# Altium PCB STM32控制器.PCBDOC (part 1 of 2)
Units mil, origin at the board's own origin, x right, y up, seen from the top; angles counter-clockwise.
Board outline 2755.91 x 393.7 mil, 4 copper layers (Top Layer, 2, 3, Bottom Layer), stack 30.634 mil thick; 86 components, 64 nets, 285 pads, 84 vias.
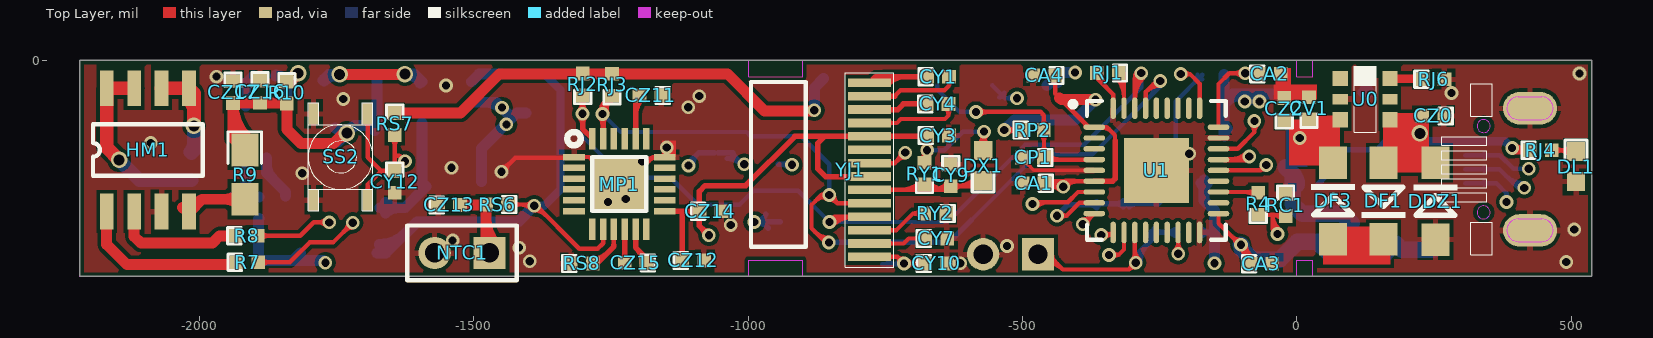
[diagram p0: Top Layer view]
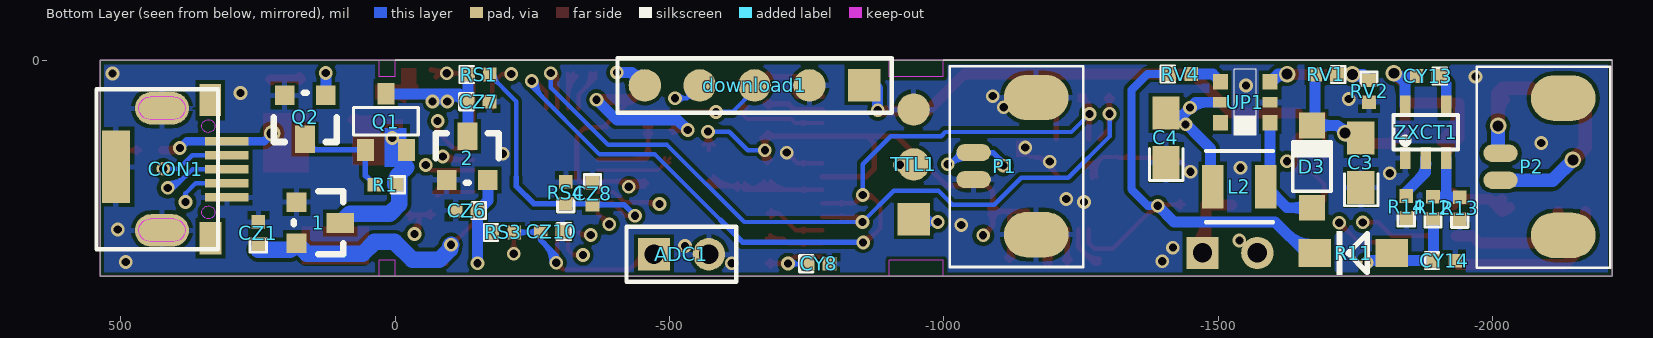
[diagram p1: Bottom Layer view, seen from below]
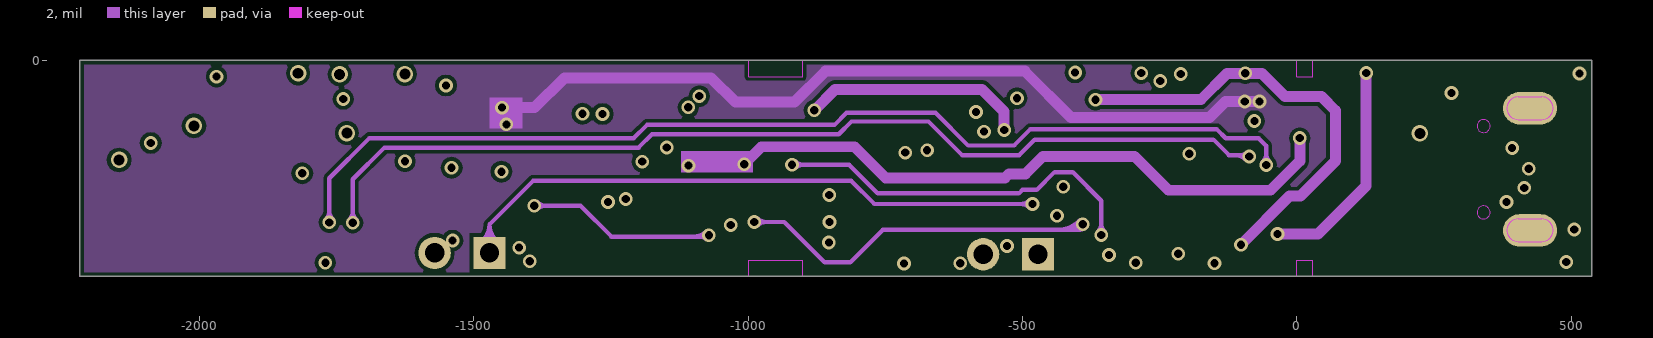
[diagram p2: 2]
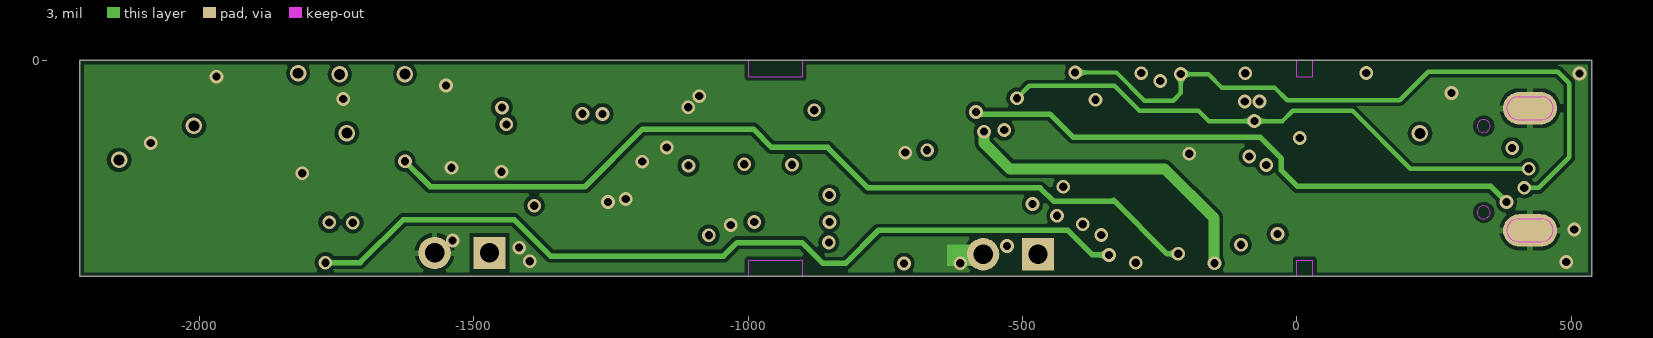
[diagram p3: 3]

## Layer stack, top to bottom
Top Layer: signal copper 1.4
Dielectric: core 10, FR-4, Dk 4.2
2: signal copper 1.417
Dielectric: prepreg 5, Dk 4.2
3: signal copper 1.417
Dielectric: core 10, Dk 4.2
Bottom Layer: signal copper 1.4

## Board outline
-2218.11,-393.7 537.8,-393.7 537.8,0 -2218.11,0

## Design rules (kind name [scope] priority, off if disabled: settings)
Clearance [All] p1: gap=7
ComponentClearance [All] p1: gap=10 collisioncheckmode=3
PolygonConnect [All] p1: connectstyle=Relief reliefconductorwidth=10 reliefentries=4 polygonreliefangle="90 Angle"
RoutingVias [All] p1: holewidth=28 width=50 viastyle="Through Hole" minholewidth=1 minwidth=1 maxholewidth=111 maxwidth=111
SolderMaskExpansion [All] p1: expansion=4
TestPointUsage FabricationTestPointUsage [All] p1: valid=0 allowmultiple=FALSE
Testpoint FabricationTestpoint [(IsPad And (OnTopLayer Or OnBottomLayer))] p1: side=3 testpointundercomponent=TRUE minsize=40 maxsize=100 preferedsize=60 minholesize=0 maxholesize=40 preferedholesize=32 testpointgrid=1 style=297 order=1234567890
Width [All] p1: maxlimit=1111 minlimit=1 preferedwidth=10 toplayer_prefwidth=8 midlayer1_prefwidth=20 bottomlayer_prefwidth=30 minimp=50.000000 maximp=50.000000 favimp=50.000000
17 further rules are at their usual default settings.

## Components (designator, comment, footprint, x,y, rotation, side; value= is the part's Value field where it differs from the comment)
1 "662K" SOT23-3-1 179.86,-258.38 r270 bottom
2 "662K" SOT23-3-1 -93.77,-217.94 r180 bottom
ADC1 "Header 2" HDR1X2 -471.71,-353.23 r180 bottom
C3 "22uF" 0805 -1760.33,-231.61 r90 bottom
C4 "22uF" 0805 -1404.98,-185.63 r90 bottom
CA1 "104" 0402 -459.7,-223.9 r180 top
CA2 "104" 0402 -69.21,-24.4 r0 top
CA3 "104" 0402 -84.49,-370.65 r0 top
CA4 "104" 0402 -440.48,-27.24 r180 top
CON1 "USB_1" "USB 贴片 - 2" 307.06,-147.08 r180 bottom
CP1 "104" 0402 -460.87,-176.72 r180 top
CV1 "10uF" 0402 22.42,-107.23 r90 top
CY1 "105" 0402 -673.91,-29.53 r0 top
CY3 "4.7uf" 0402 -673.83,-136.77 r0 top
CY4 "105" 0402 -674.83,-79.3 r0 top
CY7 "2.2UF" 0402 -677.33,-324.41 r0 top
CY8 "4.7UF" 0402 -751.78,-370.53 r180 bottom
CY9 "4.7UF" 0402 -630.6,-189.44 r270 top
CY10 "0.1UF" 0402 -677.45,-369.92 r0 top
CY12 "104" 0402 -1644.29,-201.31 r270 top
CY13 "104" 0402 -1901.86,-28.29 r0 bottom
CY14 "4.7uF" 0402 -1892.39,-364.81 r180 bottom
CZ0 "105" 0402 268.75,-101.04 r180 top
CZ1 "105" 0402 249.49,-334.5 r90 bottom
CZ2 "105" 0402 -23.03,-108.34 r90 top
CZ6 "105" 0402 -150.17,-273.72 r0 bottom
CZ7 "105" 0402 -132.03,-75.34 r180 bottom
CZ8 "104" 0402 -359.77,-222.72 r270 bottom
CZ10 "104" 0402 -305.12,-311.97 r0 bottom
CZ11 "104" 0402 -1157.98,-63.74 r180 top
CZ12 "104" 0402 -1120.14,-364.47 r0 top
CZ13 "104" 0402 -1565.37,-263.23 r0 top
CZ14 "104" 0402 -1088.86,-274.77 r0 top
CZ15 "104" 0402 -1185.24,-368.96 r180 top
CZ16 "106" 0402 -1889.83,-37.06 r270 top
CZ17 "104" 0402 -1939.08,-37.61 r270 top
D3 "MBR0520" SOD-123 -1671.11,-193.43 r270 bottom
DDZ1 "25V" DIODE_SOP 252.67,-326.73 r90 top
DF1 "M7" DIODE_SOP 157.86,-186.06 r270 top
DF3 "M7" DIODE_SOP 66.09,-326.07 r90 top
DL1 "RED" 0603 508.73,-193.77 r270 top
download1 "Header 5" HDR1X5 -855.09,-45.38 r0 bottom
DX1 "SS14" 0603 -571.57,-190.96 r90 top
HM1 "HM2503" SOP-8 -2169.32,-275.26 r90 top
L2 "4.7uH" L3*3mm -1486.95,-230.09 r0 bottom
MP1 "MPU6050" QFN24 -1234.89,-225.22 r0 top
NTC1 "2.54-2P" HDR1X2 -1471.61,-350.84 r180 top
P1 "1.25-2P" 1.25卧贴-立式通用-2P -1054.26,-167.92 r270 bottom locked
P2 "1.25-2P" 1.25卧贴-立式通用-2P -2014.83,-169 r270 bottom
Q1 "P-MOS AO3401" SOT23 16.91,-111.92 r180 bottom
Q2 "NPN 8050/9013" NPN-SOT3 126.47,-63.54 r0 bottom
R1 "100K" 0402 -2.23,-226.5 r0 bottom
R4 "1K" 0402 -70.33,-281.01 r90 top
R7 "1K" 0402 -1933.14,-367.9 r0 top
R8 "1K" 0402 -1933.99,-319.55 r0 top
R9 "0.50R" 0805 -1917.23,-162.95 r270 top
R10 "500R" 0402 -1840.91,-38.57 r270 top
R11 "1N4148" DIODE_SOP -1816.46,-351.04 r0 bottom
R12 "2K" 0402 -1891.56,-288.42 r90 bottom
R13 "5.1K" 0402 -1940.43,-289.47 r90 bottom
R14 "0" 0402 -1843.02,-286.99 r90 bottom
RC1 "10K" 0402 -20.3,-243.5 r270 top
RJ1 "10K" 0402 -324.72,-22.78 r180 top
RJ2 "10K" 0402 -1301.76,-63.68 r90 top
RJ3 "10K" 0402 -1248.1,-64.25 r90 top
RJ4 "1K" 0402 424.9,-163.64 r0 top
RJ6 "1.66K" 0402 229.44,-34.24 r0 top
RP2 "10K" 0402 -501.07,-126.8 r0 top
RS1 "100K" 0402 -132.58,-25.63 r180 bottom
RS3 "10K" 0402 -177.13,-313.49 r180 bottom
RS4 "100K" 0402 -311.04,-261.13 r90 bottom
RS6 "10K" 0402 -1437.71,-262.59 r180 top
RS7 "10K" 0402 -1644.32,-95.69 r270 top
RS8 "4.7K" 0402 -1323.41,-369.93 r0 top
RV1 "110K" 0402 -1716.69,-25.49 r0 bottom
RV2 "15K" 0402 -1775.14,-36.02 r270 bottom
RV4 "10K" 0402 -1410.83,-24.72 r180 bottom
RY1 "4.7k" 0402 -678.52,-226.21 r90 top
RY2 "560k" 0402 -638.9,-278.9 r180 top
SS2 "SW-PB" SW_smt3*3 -1693.68,-254.43 r270 top
TTL1 "Header 3" HDR1X3 -945.04,-289.31 r90 top
U0 "TP4057" SOT23-6 124.45,-70.58 r270 top
U1 "STM32F103T8U6 QFN36" QFN36 -255.87,-200.31 r0 top
UP1 "SX1308" SOT23-6 -1549.62,-76.14 r90 bottom
YJ1 "0.69寸液晶屏" "0.86寸 oled 显示屏" -778.62,-199.29 r0 top
ZXCT1 "ZXCT1010" SOT23-5 -1841.08,-177.82 r180 bottom

## Footprints (in the part's own frame and the unit in brackets; to place one, negate y for a bottom-side part, rotate by r counter-clockwise, add the part's x,y. Pads: shape width x height; smd on the part's side, far side on the other; paste and mask are expansions set on the pad)
"0.86寸 oled 显示屏" [mm]
  rect 2x0.4 smd: 1(0,4.03) 2(0,3.41) 3(0,2.79) 4(0,2.17) 5(0,1.55) 6(0,0.93) 7(0,0.31) 8(0,-0.31) 9(0,-0.93) 10(0,-1.55) 11(0,-2.17) 12(0,-2.79) 13(0,-3.41) 14(0,-4.03)
  round 1 on Top Overlay: 19(-1.774,3.963)
  silkscreen extent -1.12,-4.5 1.12,4.5
1.25卧贴-立式通用-2P [mm]
  oval 2.1x3 smd: 0(-2.55,2.9) 0(3.8,2.9)
  oval 0.8x1.6 smd: 1(0,0) 2(1.25,0)
  round 1.524 on Bottom Overlay: 10(-2.096,0.066)
  silkscreen extent -4,-1.1 5.3,5.08
0402 [mil]
  rect 25x25 smd: 1(0,0) 2(40,0)
  silkscreen extent -15,-15 10,15
0603 [mil]
  rect 35x33 smd: 1(-28,0) 2(27,0)
  silkscreen extent -49,-20 -12,20
0805 [mil]
  rect 60x50 smd: 1(0,0) 2(90,0)
  silkscreen extent -33,-31 25,30
DIODE_SOP [mm]
  rect 1.5x1.3 smd: 1(0,0) 2(3.556,0)
  silkscreen extent 1.14,-1.02 2.56,1.02
HDR1X2 [mm]
  rect 1.5x1.5 hole 0.9: 1(0,0)
  round 1.5 hole 0.9: 2(2.54,0)
  silkscreen extent -1.27,-1.27 3.81,1.27
HDR1X3 [mm]
  rect 1.5x1.5 smd far side: 1(0,0)
  round 1.5 smd far side: 2(2.54,0) 3(5.08,0)
  silkscreen extent -1.27,-1.27 6.35,1.27
HDR1X5 [mm]
  rect 1.5x1.5 smd: 1(0,0)
  round 1.5 smd: 2(2.54,0) 3(5.08,0) 4(7.62,0) 5(10.16,0)
  silkscreen extent -1.27,-1.27 11.43,1.27
L3*3mm [mm]
  rect 1x2 smd: 1(-0.085,-0.001) 2(-2.541,-0.001)
  silkscreen extent -2.88,-1.65 0.23,1.65
NPN-SOT3 [mil]
  rect 36x50 smd: 1(38,80)
  rect 36x36 smd: 2(0,0) 3(75,0)
  silkscreen extent -20,-5 95,85
QFN24 [mm]
  rect 1x0.3 smd: 1(-2.1,1.25) 2(-2.1,0.75) 3(-2.1,0.25) 4(-2.1,-0.25) 5(-2.1,-0.75) 6(-2.1,-1.25) 13(2.1,-1.25) 14(2.1,-0.75) 15(2.1,-0.25) 16(2.1,0.25) 17(2.1,0.75) 18(2.1,1.25)
  rect 0.3x1 smd: 7(-1.25,-2.1) 8(-0.75,-2.1) 9(-0.25,-2.1) 10(0.25,-2.1) 11(0.75,-2.1) 12(1.25,-2.1) 19(1.25,2.1) 20(0.75,2.1) 21(0.25,2.1) 22(-0.25,2.1) 23(-0.75,2.1) 24(-1.25,2.1)
  rect 2.5x2.5 smd: 25(0,0)
  silkscreen extent -2.41,-1.25 1.25,2.41
QFN36 [mm]
  rect 3x3 smd: 0(0,0)
  oval 1x0.25 smd: 1(-2.875,2) 2(-2.875,1.5) 3(-2.875,1) 4(-2.875,0.5) 5(-2.875,0) 6(-2.875,-0.5) 7(-2.875,-1) 8(-2.875,-1.5) 9(-2.875,-2) 19(2.875,-2) 20(2.875,-1.5) 21(2.875,-1) 22(2.875,-0.5) 23(2.875,0) 24(2.875,0.5) 25(2.875,1) 26(2.875,1.5) 27(2.875,2)
  oval 0.25x1 smd: 10(-2,-2.875) 11(-1.5,-2.875) 12(-1,-2.875) 13(-0.5,-2.875) 14(0,-2.875) 15(0.5,-2.875) 16(1,-2.875) 17(1.5,-2.875) 18(2,-2.875) 28(2,2.875) 29(1.5,2.875) 30(1,2.875) 31(0.5,2.875) 32(0,2.875) 33(-0.5,2.875) 34(-1,2.875) 35(-1.5,2.875) 36(-2,2.875)
  silkscreen extent -3.99,-3.21 3.21,3.21
SOD-123 [mm]
  rect 1.2x1.2 smd: 1(1.905,0) 2(-1.905,0)
  silkscreen extent -1.14,-0.89 1.14,0.89
SOP-8 [mil]
  rect 65x25 smd: 1(0,0) 2(0,-50) 3(0,-100) 4(0,-150) 5(224.41,-150) 6(224.41,-100) 7(224.41,-50) 8(224.41,0)
  silkscreen extent 65,-175 159,25
SOT23 [mil] "SOT23"
  rect 31.5x39.4 smd: 1(-37.4,-51.2) 2(37.4,-51.2) 3(0,51.2)
  silkscreen extent -59,-24 59,26
SOT23-3-1 [mil]
  rect 36x36 smd: 1(75,0) 2(0,0)
  rect 36x50 smd: 3(38,80)
  silkscreen extent -20,-5 95,85
SOT23-5 [mm]
  rect 0.5x1 smd: 1(0,0) 2(0.95,0) 3(1.9,0) 4(1.9,2.4) 5(0,2.4)
  silkscreen extent -0.55,0.4 2.45,2
SOT23-6 [mm] "MAX9041,3mm*3mm*1.5mm"
  rect 0.7x0.7 smd: 1(-0.95,-1.15) 3(0.95,-1.15) 4(0.95,1.15) 6(-0.95,1.15)
  rect 0.5x0.7 smd: 2(0,-1.15) 5(0,1.15)
  silkscreen extent -1.52,-0.51 1.52,0.51
SW_smt3*3 [mm]
  rect 1x0.5 smd: 1(-3.993,-0.003) 1(0,0) 2(-3.994,-2.499) 2(0.002,-2.503)
  silkscreen extent -4.5,-2.75 0.5,0.25
"USB 贴片 - 2" [mm]
  rect 1.3x3.35 smd: 0(-5.123,-1.186)
  oval 2.5x1.5 all layers, no hole: 0(-3.003,-4.13) 0(-3,1.524)
  rect 1x1.5 smd: 0(-0.764,1.904) 0(-0.754,-4.498)
  round 1 on Bottom Overlay: 0(0.411,1.162)
  rect 2x0.4 smd: 1(0,0) 2(0,-0.65) 3(0,-1.3) 4(0,-1.95) 5(0,-2.6)
  Keep-Out Layer circle w0.013: c-0.854,-3.299 r0.3
  Keep-Out Layer circle w0.013: c-0.854,-3.299 r0.3
  Keep-Out Layer circle w0.013: c-0.854,0.701 r0.3
  Keep-Out Layer circle w0.013: c-0.854,0.701 r0.3
  Keep-Out Layer lines w0.013: -2.454,-4.649 ccw(c-2.454,-4.124) -2.454,-3.599 ; -2.454,-4.649 ccw(c-2.454,-4.124) -2.454,-3.599 ; -2.454,-4.649 -3.554,-4.649 ; -2.454,-4.649 -3.554,-4.649 ; -2.454,-3.599 -3.554,-3.599 ; -2.454,-3.599 -3.554,-3.599 ; -2.454,1.001 ccw(c-2.454,1.526) -2.454,2.051 ; -2.454,1.001 ccw(c-2.454,1.526) -2.454,2.051 ; -2.454,1.001 -3.554,1.001 ; -2.454,1.001 -3.554,1.001 ; -2.454,2.051 -3.554,2.051 ; -2.454,2.051 -3.554,2.051 ; -3.554,-4.649 cw(c-3.554,-4.124) -3.554,-3.599 ; -3.554,-4.649 cw(c-3.554,-4.124) -3.554,-3.599 ; -3.554,1.001 cw(c-3.554,1.526) -3.554,2.051 ; -3.554,1.001 cw(c-3.554,1.526) -3.554,2.051
  silkscreen extent -6.03,-5 -0.4,2.4

## Part data
1 2: library part MH5330
ADC1: "Header, 2-Pin"
C3 C4: library part 47uF
CA1 CA2 CA3 CA4 CP1 CY12 CY13 CZ8 CZ10 CZ11 CZ12 CZ13 CZ14 CZ15 CZ17: "Capacitor"
CV1: library part "Cap Pol1", "Polarized Capacitor (Radial)"
CY1 CY4 CY14 CZ0 CZ1 CZ2 CZ6 CZ7 CZ16: library part 104, "Capacitor"
CY3 CY7 CY8 CY9 CY10: library part Cap, "Capacitor"
D3: library part D_1, "1N4148"
DDZ1: library part "D Zener", "Zener Diode"
DF1 DF3 R11: library part D
DL1: library part LED1, "Typical RED GaAs LED"
download1: "Header, 5-Pin"
DX1: library part "Diode 1N4001", "1 Amp General Purpose Rectifier"
L2: library part 2.2uH
NTC1 P1 P2: library part "Header 2", "Header, 2-Pin"
Q1: library part AO3401
Q2: library part NPN, "NPN Bipolar Transistor"
R1: library part RES
R4 R7 R8 R9 R10 R12 R13 R14 RC1 RJ4 RJ6 RV1 RV2 RV4: library part RES2
RJ1 RJ2 RJ3 RP2 RS1 RS3 RS4 RS6 RS7 RS8 RY1 RY2: library part Res2, "Resistor"
SS2: "Switch"
TTL1: "Header, 3-Pin"
YJ1: library part 0.86寸液晶屏

## Via types
v1: diameter 25, hole 15, Top Layer to Bottom Layer, 77 vias
v2: diameter 30, hole 20, Top Layer to Bottom Layer, 7 vias

## Nets (pads, with @x,y where several pads share a name; then routed paths per layer and width w, separated by ;. In a path a pad name is that pad's centre, name@x,y a point inside that pad or via, vN(x,y) a via of type N, cw(c..) or ccw(c..) an arc to the next point about the centre after c; other vN are vias at no path point)
3.3V: 1.1 CA1.1 CA2.1 CA3.1 CA4.1 CZ1.1 download1.1 RJ2.2 RJ3.2 RP2.1 RS7.1 U1.1 U1.6 U1.19 U1.27 | length 4667.4
  Top Layer w8: v1(-533.43,-126.8) RP2.1@-501.07,-126.8 ; CA4.1@-440.48,-27.24 -440.48,-60.3 -432.11,-68.66 ; -429.24,-71.53 -379.21,-121.56 -346.07,-121.56 -331.32,-136.32 -331.32,-146.5 ; -416.55,-219.99 CA1.1@-455.79,-219.99 ; -406.08,-219.99 U1.6@-369.06,-219.99 ; U1.19@-142.68,-279.05 -142.68,-296.47 -84.49,-354.66 ; U1.27@-142.68,-121.56 -142.68,-42.91 -123.21,-23.44 v1(-94.01,-23.44) ; CA3.1@-84.49,-370.65 -84.49,-354.66 ; v1@-521.59,-126.8 cw(c-521.59,-147.32) -507.08,-132.81 ccw(c-521.59,-147.32) v1@-521.59,-126.8 ; v1@-521.59,-126.8 ccw(c-521.59,-106.27) -507.08,-120.78 cw(c-521.59,-106.27) v1@-521.59,-126.8 ; RP2.1@-512.91,-126.8 cw(c-512.91,-106.27) -527.42,-120.78 ccw(c-512.91,-106.27) RP2.1@-512.91,-126.8 ; RP2.1@-512.91,-126.8 ccw(c-512.91,-147.32) -527.42,-132.81 cw(c-512.91,-147.32) RP2.1@-512.91,-126.8 ; CA1.1@-455.79,-219.99 cw(c-455.79,-244.68) -433.55,-233.94 ccw(c-455.79,-244.68) CA1.1@-455.79,-219.99 ; CA1.1@-455.79,-219.99 -445.53,-230.25 ; -445.53,-230.25 cw(c-445.53,-248.67) -432.1,-236.06 ccw(c-445.53,-248.67) -445.53,-230.25 ; -445.53,-230.25 ccw(c-445.53,-211.82) -432.1,-224.43 cw(c-445.53,-211.82) -445.53,-230.25 ; -445.53,-230.25 v1(-425.9,-230.25) ; -440.48,-47.77 cw(c-419.95,-47.77) -434.46,-33.26 ccw(c-419.95,-47.77) -440.48,-47.77 ; -440.47,-47.77 ccw(c-461,-47.77) -446.49,-33.26 cw(c-461,-47.77) -440.47,-47.77 ; v1(-425.9,-230.25) cw(c-425.9,-192.87) -453.44,-218.15 ccw(c-425.9,-192.87) v1(-425.9,-230.25) ; -114.53,-23.44 cw(c-114.53,-43.96) -100.02,-29.45 ccw(c-114.53,-43.96) -114.53,-23.44 ; -114.53,-23.44 ccw(c-114.53,-2.91) -100.02,-17.42 cw(c-114.53,-2.91) -114.53,-23.44 ; -84.49,-354.66 cw(c-95.28,-354.66) -89.25,-363.6 ccw(c-95.28,-354.66) -84.49,-354.66 ; -84.49,-354.66 ccw(c-73.71,-354.66) -79.74,-363.6 cw(c-73.71,-354.66) -84.49,-354.66 ; CA1.1@-459.33,-223.56 ccw(c-444.11,-209.58) -444.11,-230.25 cw(c-444.11,-209.58) CA1.1@-459.33,-223.56 ; CA1.1@-453.69,-229.91 cw(c-429.75,-253.85) -429.75,-219.99 ccw(c-429.75,-253.85) CA1.1@-453.69,-229.91 ; -443.04,-219.99 cw(c-443.04,-238.53) -426.35,-230.46 ccw(c-443.04,-238.53) -443.04,-219.99 ; -388.66,-112.11 cw(c-398.12,-121.56) -384.74,-121.56 ccw(c-398.12,-121.56) -388.66,-112.11 ; U1.1@-354.3,-122.49 cw(c-354.3,-144.57) -338.68,-128.95 ccw(c-354.3,-144.57) U1.1@-354.3,-122.49 ; U1.1@-354.06,-122.45 cw(c-350.79,-134.51) -341.96,-125.68 ccw(c-350.79,-134.51) U1.1@-354.06,-122.45 ; -118.9,-320.25 ccw(c-101.88,-303.22) -101.88,-327.3 cw(c-101.88,-303.22) -118.9,-320.25 ; -115.35,-323.81 cw(c-127.34,-335.8) -110.38,-335.8 ccw(c-127.34,-335.8) -115.35,-323.81 ; v1@-110.31,-328.85 cw(c-152.11,-370.65) -92.99,-370.65 ccw(c-152.11,-370.65) v1@-110.31,-328.85 ; v1@-101.88,-344.3 cw(c-101.88,-361.27) -89.88,-349.27 ccw(c-101.88,-361.27) v1@-101.88,-344.3 ; v1@-96.65,-342.5 cw(c-124.8,-370.65) -84.99,-370.65 ccw(c-124.8,-370.65) v1@-96.65,-342.5 ; v1@-93.38,-335.8 ccw(c-69.3,-335.8) -86.32,-352.83 cw(c-69.3,-335.8) v1@-93.38,-335.8 ; -83,-356.16 cw(c-97.49,-370.65) -76.99,-370.65 ccw(c-97.49,-370.65) -83,-356.16
  Top Layer w10: v1(-425.9,-230.25) v1@-425.9,-229.34 ; -416.55,-219.99 -406.08,-219.99 ; U1.6@-369.06,-219.99 -335.84,-219.99 -331.32,-215.47 -331.32,-146.5 ; v1(-94.01,-23.44) -70.64,-18.13 CA2.1@-65.64,-16.99 ; -406.08,-219.99 ccw(c-406.08,-232.43) -418.45,-231.07 cw(c-406.08,-232.43) -406.08,-219.99 ; CA2.1@-76.35,-19.42 cw(c-80.36,-1.77) -90.01,-17.09 ccw(c-80.36,-1.77) CA2.1@-76.35,-19.42 ; CA2.1@-76.35,-19.42 ccw(c-72.34,-37.08) -87.66,-27.43 cw(c-72.34,-37.08) CA2.1@-76.35,-19.42 ; v1@-428.38,-229.97 cw(c-417.24,-231.2) -417.24,-219.99 ccw(c-417.24,-231.2) v1@-428.38,-229.97 ; v1@-95.43,-23.76 cw(c-90.41,-45.87) -74.48,-29.73 ccw(c-90.41,-45.87) v1@-95.43,-23.76
  Top Layer w20: RS7.1@-1644.32,-95.69 -1524.72,-95.69 -1453.29,-24.25 -1037.68,-24.25 -970.19,-91.75 v1@-880.44,-91.75 ; -432.11,-68.66 -429.24,-71.53 v1(-367.1,-71.53)
  2 w20: v1(-879.53,-90.84) -841.45,-52.76 -573.99,-52.76 -533.43,-93.32 v1(-533.43,-126.8) ; v1(-367.1,-71.53) -175.03,-71.53 -126.94,-23.44 -63.53,-23.44 -21.13,-65.84 44.73,-65.84 70.49,-91.59 70.49,-183.54 6.91,-247.12 -13.19,-247.12 v1(-101.88,-335.8)
  Bottom Layer w20: v1(-879.53,-90.84) -879.53,-49.86 download1.1@-862.83,-33.16 ; v1(-533.43,-126.8) -514.91,-108.28 -403.86,-108.28 v1(-367.1,-71.53)
  Bottom Layer w30: v1(-101.88,-335.8) -99.92,-337.76 -99.92,-343.99 -80.65,-363.25 -31.44,-363.25 1.09,-330.72 37.85,-330.72 59.37,-352.24 161,-352.24 1.1@179.86,-333.38 191.5,-345.02 CZ1.1@249.69,-345.02
AD0: MP1.9 RS8.2 | length 139.1
  Top Layer w8: -1244.74,-336.48 MP1.9@-1244.74,-307.89
  Top Layer w10: RS8.2@-1282.8,-368.35 -1274.08,-368.35 -1244.74,-339.01 -1244.74,-336.48 ; RS8.2@-1283.41,-362.43 ccw(c-1283.41,-325.63) -1257.39,-351.66 cw(c-1283.41,-325.63) RS8.2@-1283.41,-362.43
ADC12_IN1: CZ8.2 RS1.2 RS4.1 U1.8 | length 825.2
  Top Layer w8: v1(-437.24,-282.91) -419.6,-282.91 ; U1.8@-369.06,-259.36 -396.04,-259.36 -419.6,-282.91 ; -419.6,-282.91 cw(c-419.6,-268.87) -430.59,-277.62 ccw(c-419.6,-268.87) -419.6,-282.91 ; -419.6,-282.91 ccw(c-419.6,-296.96) -430.59,-288.21 cw(c-419.6,-296.96) -419.6,-282.91
  Bottom Layer w8: -220.49,-212.85 -220.49,-74.57 -172.58,-26.67 RS1.2@-172.58,-25.63 ; -187.83,-41.92 ccw(c-204.11,-25.63) -181.08,-25.63 cw(c-204.11,-25.63) -187.83,-41.92 ; -185.32,-39.41 cw(c-172.58,-52.14) -172.58,-34.13 ccw(c-172.58,-52.14) -185.32,-39.41
  Bottom Layer w10: v1(-437.24,-282.91) -417.04,-262.72 CZ8.2@-359.77,-262.72 ; CZ8.2@-359.77,-261.13 -252.57,-261.13 -220.49,-229.05 -220.49,-212.85 ; -377.88,-262.72 cw(c-377.88,-280.83) -365.07,-268.02 ccw(c-377.88,-280.83) -377.88,-262.72 ; -377.88,-262.72 ccw(c-377.88,-244.61) -365.07,-257.42 cw(c-377.88,-244.61) -377.88,-262.72 ; -329.15,-261.13 cw(c-329.15,-279.24) -316.35,-266.44 ccw(c-329.15,-279.24) -329.15,-261.13 ; -329.15,-261.13 ccw(c-329.15,-243.03) -316.35,-255.83 cw(c-329.15,-243.03) -329.15,-261.13 ; -292.94,-261.13 cw(c-292.94,-243.03) -305.74,-255.83 ccw(c-292.94,-243.03) -292.94,-261.13 ; -292.94,-261.13 ccw(c-292.94,-279.24) -305.74,-266.44 cw(c-292.94,-279.24) -292.94,-261.13
ADC12_IN4: CY14.1 R11.1 R12.1 U1.11 | length 1982.8
  Top Layer w8: v1(-342.43,-354.44) -324.86,-354.44 ; U1.11@-314.93,-313.49 -314.93,-344.51 -324.86,-354.44 ; -324.86,-354.44 cw(c-324.86,-340.53) -335.77,-349.17 ccw(c-324.86,-340.53) -324.86,-354.44 ; -324.86,-354.44 ccw(c-324.86,-368.36) -335.77,-359.72 cw(c-324.86,-368.36) -324.86,-354.44
  3 w10: v1(-1770.74,-368.52) -1707.32,-368.52 -1628.68,-289.87 -1426.88,-289.87 -1360.05,-356.7 -1044.99,-356.7 -1020.25,-331.97 -901.78,-331.97 -864.02,-369.72 -822.36,-369.72 -762.04,-309.4 -417.68,-309.4 -372.64,-354.44 v1(-342.43,-354.44) ; -360.54,-354.44 cw(c-360.54,-372.55) -347.74,-359.75 ccw(c-360.54,-372.55) -360.54,-354.44 ; -360.54,-354.44 ccw(c-360.54,-336.34) -347.74,-349.14 cw(c-360.54,-336.34) -360.54,-354.44
  Bottom Layer w15: v1@-1775.81,-364.81 v1(-1770.74,-368.52)
  Bottom Layer w20: R12.1@-1891.56,-288.42 -1892.39,-289.24 CY14.1@-1892.39,-364.81 -1774.45,-364.81 v1(-1770.74,-368.52) ; R11.1@-1830.22,-364.81 R11.1@-1816.46,-351.04 ; -1785.74,-364.81 cw(c-1785.74,-383.52) -1772.51,-370.29 ccw(c-1785.74,-383.52) -1785.74,-364.81
ADC12_IN5: ADC1.1 CZ10.2 RS3.2 U1.12 | length 964.2
  Top Layer w8: ADC1.1@-453.26,-354.22 -426.49,-380.99 -305.75,-380.99 ; U1.12@-295.24,-313.49 -295.24,-366.23 v1@-292.41,-369.06 ; v1@-290.64,-371.53 v1(-293.46,-368.7) -305.75,-380.99 ; -305.75,-380.98 cw(c-296.2,-390.53) -294.52,-377.13 ccw(c-296.2,-390.53) -305.75,-380.98 ; -305.75,-380.98 ccw(c-315.3,-371.43) -301.9,-369.76 cw(c-315.3,-371.43) -305.75,-380.98 ; ADC1.1@-469.04,-362.38 cw(c-459.9,-393.66) -436.86,-370.62 ccw(c-459.9,-393.66) ADC1.1@-469.04,-362.38 ; ADC1.1@-466.8,-370.06 cw(c-455.59,-408.44) -427.31,-380.17 ccw(c-455.59,-408.44) ADC1.1@-466.8,-370.06 ; ADC1.1@-446.18,-353.23 ccw(c-426.72,-353.23) -440.48,-367 cw(c-426.72,-353.23) ADC1.1@-446.18,-353.23 ; v1@-299.47,-362.69 ccw(c-309.69,-352.47) -295.24,-352.47 cw(c-309.69,-352.47) v1@-299.47,-362.69 ; -295.24,-343.89 ccw(c-268.65,-343.89) -287.45,-362.69 cw(c-268.65,-343.89) -295.24,-343.89
  Bottom Layer w8: v1(-293.46,-368.7) v1@-290.82,-371.35
  Bottom Layer w10: v1(-293.46,-368.7) -293.46,-355.61 ; RS3.2@-217.13,-313.49 -263.6,-313.49 CZ10.2@-265.12,-311.97 -265.12,-327.27 ; -293.46,-355.61 cw(c-301.14,-355.61) -297.26,-362.23 ccw(c-301.14,-355.61) -293.46,-355.61 ; -293.46,-355.61 ccw(c-285.79,-355.61) -289.67,-362.23 cw(c-285.79,-355.61) -293.46,-355.61 ; -293.46,-355.61 -265.12,-327.27 ; -265.12,-327.27 cw(c-253.27,-327.27) -260.53,-317.9 ccw(c-253.27,-327.27) -265.12,-327.27 ; -265.13,-327.27 ccw(c-276.98,-327.27) -269.72,-317.9 cw(c-276.98,-327.27) -265.13,-327.27 ; -235.24,-313.49 cw(c-235.24,-331.6) -222.43,-318.8 ccw(c-235.24,-331.6) -235.24,-313.49 ; -235.24,-313.49 ccw(c-235.24,-295.39) -222.43,-308.19 cw(c-235.24,-295.39) -235.24,-313.49 ; v1@-295.96,-368.7 cw(c-270.4,-368.7) -288.48,-350.62 ccw(c-270.4,-368.7) v1@-295.96,-368.7 ; v1@-285.96,-368.7 cw(c-236.25,-368.7) -271.4,-333.55 ccw(c-236.25,-368.7) v1@-285.96,-368.7 ; CZ10.2@-259.82,-317.27 cw(c-250.7,-326.39) -250.7,-313.49 ccw(c-250.7,-326.39) CZ10.2@-259.82,-317.27 ; CZ10.2@-259.82,-306.66 ccw(c-243.33,-290.17) -243.33,-313.49 cw(c-243.33,-290.17) CZ10.2@-259.82,-306.66
ADC12_IN6: U1.13
AUX-CL: MP1.7
AUX-DA: MP1.6
BOOT0: RJ1.1 U1.35 | length 202.3
  Top Layer w8: U1.35@-314.93,-87.12 -314.93,-25.18 RJ1.1@-314.06,-24.31 ; RJ1.1@-330.73,-28.79 cw(c-368.88,-66.95) -314.93,-66.95 ccw(c-368.88,-66.95) RJ1.1@-330.73,-28.79 ; RJ1.1@-325.07,-23.14 cw(c-349.57,-47.63) -314.93,-47.63 ccw(c-349.57,-47.63) RJ1.1@-325.07,-23.14
GND: 1.2 2.2 ADC1.2 C3.1 C4.1 CA1.2 CA2.2 CA3.2 CA4.2 CON1.0@425.3,-309.69 CON1.0@425.15,-87.09 CON1.0@508.73,-193.77 CON1.5 CP1.2 CV1.2 CY3.2 CY7.2 CY8.2 CY9.1 CY10.2 CY12.2 CY14.2 CZ0.1 CZ1.2 CZ2.2 CZ6.2 CZ7.2 CZ8.1 CZ10.1 CZ11.1 CZ12.2 CZ13.1 CZ14.2 CZ16.1 CZ17.1 DDZ1.1 DL1.2 download1.2 HM1.3 MP1.1 MP1.18 MP1.25 NTC1.2 P1.0 P1.2 Q2.3 R13.1 R14.1 RC1.1 RJ1.2 RJ6.2 RS4.2 RS8.1 RV2.2 RY2.1 SS2.2 TTL1.3 U0.2 U1.0 U1.5 U1.18 U1.26 U1.36 UP1.2 YJ1.7 ZXCT1.1 | length 1681.7
  Top Layer w6: CP1.2@-500.87,-176.72 -500.87,-178.52 -479.08,-200.31 U1.5@-369.06,-200.31 ; CP1.2@-500.87,-186.22 cw(c-500.87,-204.81) -487.73,-191.66 ccw(c-500.87,-204.81) CP1.2@-500.87,-186.22 ; CP1.2@-491.37,-176.72 ccw(c-464.09,-176.72) -483.38,-196.01 cw(c-464.09,-176.72) CP1.2@-491.37,-176.72
  Top Layer w8: v1(-1449.85,-202.68) -1424.38,-177.21 MP1.1@-1318.22,-177.21 ; MP1.1@-1317.57,-176 -1289.64,-176 MP1.25@-1279.49,-186.15 ; MP1.25@-1208.01,-210.2 -1173.82,-176.01 ; MP1.18@-1157.22,-176.01 -1173.82,-176.01 ; YJ1.7@-778.62,-187.09 -732.84,-187.09 v1(-713.71,-167.96) ; RJ1.2@-364.72,-22.78 -364.72,-31.92 -334.61,-62.03 U1.36@-334.61,-87.12 ; CA2.2@-29.21,-24.4 -23.03,-30.58 CZ2.2@-23.03,-68.34 21.31,-68.34 CV1.2@22.42,-67.23 ; -1435.34,-188.17 cw(c-1449.85,-173.66) -1449.85,-194.18 ccw(c-1449.85,-173.66) -1435.34,-188.17 ; -1435.34,-188.17 ccw(c-1420.83,-202.68) -1441.35,-202.68 cw(c-1420.83,-202.68) -1435.34,-188.17 ; -1286.87,-178.77 cw(c-1310.97,-202.87) -1278.27,-212.47 ccw(c-1310.97,-202.87) -1286.87,-178.77 ; -1286.87,-178.77 ccw(c-1266.62,-158.52) -1254.31,-184.39 cw(c-1266.62,-158.52) -1286.87,-178.77 ; -1173.82,-176.01 cw(c-1181.97,-167.86) -1188.5,-177.36 ccw(c-1181.97,-167.86) -1173.82,-176.01 ; -737.78,-187.09 cw(c-737.78,-177.74) -744.39,-184.35 ccw(c-737.78,-177.74) -737.78,-187.09 ; -737.78,-187.09 ccw(c-737.78,-196.44) -744.39,-189.83 cw(c-737.78,-196.44) -737.78,-187.09 ; -728.22,-182.47 cw(c-713.71,-196.98) -713.71,-176.46 ccw(c-713.71,-196.98) -728.22,-182.47 ; -728.22,-182.47 ccw(c-742.73,-167.96) -722.21,-167.96 cw(c-742.73,-167.96) -728.22,-182.47 ; -23.03,-47.82 cw(c-43.55,-47.82) -29.04,-62.33 ccw(c-43.55,-47.82) -23.03,-47.82 ; -23.03,-47.82 ccw(c-2.51,-47.82) CZ2.2@-17.02,-62.33 ; -23.03,-47.82 ccw(c-2.51,-47.82) CZ2.2@-17.02,-62.33 ; CZ2.2@-17.02,-62.33 ccw(c-2.51,-47.82) -2.51,-68.34 ; CZ2.2@-17.02,-62.33 ccw(c-2.51,-47.82) -2.51,-68.34 ; -2.51,-68.34 ccw(c-2.51,-88.86) -17.02,-74.35 cw(c-2.51,-88.86) -2.51,-68.34 ; -1338.87,-177.21 ccw(c-1338.87,-168.48) -1332.7,-174.66 cw(c-1338.87,-168.48) -1338.87,-177.21 ; MP1.25@-1278.86,-186.79 ccw(c-1261.45,-169.38) -1250.88,-191.61 cw(c-1261.45,-169.38) MP1.25@-1278.86,-186.79 ; MP1.25@-1277.34,-188.31 cw(c-1296.23,-207.2) -1270.6,-214.73 ccw(c-1296.23,-207.2) MP1.25@-1277.34,-188.31 ; MP1.25@-1202.44,-204.64 ccw(c-1211.55,-195.53) -1200.56,-188.81 cw(c-1211.55,-195.53) MP1.25@-1202.44,-204.64 ; MP1.25@-1195.26,-197.45 ccw(c-1202.64,-190.08) -1193.74,-184.63 cw(c-1202.64,-190.08) MP1.25@-1195.26,-197.45 ; MP1.25@-1193.03,-183.96 ccw(c-1187.51,-175.93) -1180.62,-182.82 cw(c-1187.51,-175.93) MP1.25@-1193.03,-183.96 ; -1177.72,-179.92 cw(c-1170.62,-187.02) -1166.73,-177.76 ccw(c-1170.62,-187.02) -1177.72,-179.92 ; RJ1.2@-364.22,-22.78 ccw(c-340.95,-22.78) -357.4,-39.24 cw(c-340.95,-22.78) RJ1.2@-364.22,-22.78 ; RJ1.2@-356.22,-22.78 ccw(c-313.64,-22.78) -343.75,-52.89 cw(c-313.64,-22.78) RJ1.2@-356.22,-22.78 ; CA2.2@-35.22,-30.41 cw(c-64.66,-59.85) -23.03,-59.85 ccw(c-64.66,-59.85) CA2.2@-35.22,-30.41 ; CA2.2@-29.56,-24.75 cw(c-45.35,-40.54) -23.03,-40.54 ccw(c-45.35,-40.54) CA2.2@-29.56,-24.75 ; -0.8,-68.34 ccw(c-0.8,-44.01) 16.41,-61.22 cw(c-0.8,-44.01) -0.8,-68.34 ; 4.6,-68.34 cw(c4.6,-85.05) 16.41,-73.24 ccw(c4.6,-85.05) 4.6,-68.34
  other v1: -613.42,-369.71 491.32,-367.34 -1398.02,-365.94 -1417.57,-341.12 -528.35,-338 -1538.8,-328.21 505.92,-308.14 -1031.66,-299.87 -1255.64,-257.98 -1223.35,-252.55 -1812.99,-205.62 -1540.65,-195.53 -1193.31,-184.37 -195.83,-169.92 -1148.57,-158.71 -2089.04,-150.53 -1109.13,-85.4 -1738.21,-70.33 -1089.04,-64.95 282.02,-59.4 -1550.99,-45.59 -1969.07,-29.4 515.26,-23.68
HM-BO: HM1.7 HM1.8 P2.2 | length 337
  Top Layer w25: v2(-2146.63,-181.33) -2169.32,-158.64 HM1.8@-2169.32,-50.85 HM1.7@-2119.32,-50.85
  Bottom Layer w25: v2(-2146.63,-181.33) -2109.75,-218.21 P2.2@-2014.83,-218.21
HM-FO: HM1.5 HM1.6 P2.1 | length 258
  Top Layer w25: HM1.6@-2069.32,-50.85 HM1.5@-2019.32,-50.85 -2010.37,-59.8 v2(-2010.37,-119.05) ; HM1.5@-2019.32,-70.85 cw(c-2040.92,-92.45) -2010.37,-92.45 ccw(c-2040.92,-92.45) HM1.5@-2019.32,-70.85
  Bottom Layer w25: P2.1@-2014.83,-169 -2010.37,-164.54 v2(-2010.37,-119.05) ; P2.1@-2017.13,-166.7 ccw(c-2033.44,-150.39) -2010.37,-150.39 cw(c-2033.44,-150.39) P2.1@-2017.13,-166.7
I2C1_SCL: MP1.23 RJ3.1 U1.33 YJ1.10 | length 2376.6
  Top Layer w8: v1(-852.94,-331.64) -858.87,-331.64 -884.63,-305.88 -884.63,-263.3 -866.72,-245.39 ; v1(-852.09,-245.39) -866.72,-245.39 ; v1@-851.78,-245.85 -837.31,-260.32 YJ1.10@-778.62,-260.32 ; U1.33@-275.56,-87.12 -275.56,-57.23 -255.75,-37.42 v1(-248.95,-37.42) ; -866.72,-245.39 cw(c-866.72,-253.74) -859.47,-249.6 ccw(c-866.72,-253.74) -866.72,-245.39 ; -866.72,-245.39 ccw(c-866.72,-237.05) -859.47,-241.18 cw(c-866.72,-237.05) -866.72,-245.39 ; -819.47,-260.32 cw(c-819.47,-269.67) -812.86,-263.06 ccw(c-819.47,-269.67) -819.47,-260.32 ; -819.47,-260.32 ccw(c-819.47,-250.96) -812.86,-257.58 cw(c-819.47,-250.96) -819.47,-260.32 ; -877.92,-256.59 cw(c-852.09,-282.43) -852.09,-245.89 ccw(c-852.09,-282.43) -877.92,-256.59 ; -877.57,-312.94 ccw(c-852.94,-288.31) -852.94,-323.14 cw(c-852.94,-288.31) -877.57,-312.94 ; -874.04,-252.71 cw(c-865.35,-261.4) -857.51,-251.94 ccw(c-865.35,-261.4) -874.04,-252.71 ; -867.83,-246.5 cw(c-859.72,-254.6) -852.41,-245.78 ccw(c-859.72,-254.6) -867.83,-246.5 ; v1@-852.09,-253.89 cw(c-852.09,-274.08) -837.82,-259.81 ccw(c-852.09,-274.08) v1@-852.09,-253.89 ; v1@-843.59,-245.39 ccw(c-822.73,-245.39) -837.48,-260.14 cw(c-822.73,-245.39) v1@-843.59,-245.39 ; -275.06,-56.74 cw(c-248.95,-82.85) -248.95,-45.92 ccw(c-248.95,-82.85) -275.06,-56.74 ; -261.41,-43.08 cw(c-248.95,-55.54) -248.95,-37.92 ccw(c-248.95,-55.54) -261.41,-43.08
  Top Layer w10: MP1.23@-1264.42,-142.54 -1264.42,-80.58 RJ3.1@-1248.1,-64.25 ; -1260.9,-77.06 cw(c-1248.1,-89.86) -1248.1,-71.75 ccw(c-1248.1,-89.86) -1260.9,-77.06 ; -1260.9,-77.06 ccw(c-1273.7,-64.25) -1255.6,-64.25 cw(c-1273.7,-64.25) -1260.9,-77.06 ; RJ3.1@-1248.1,-64.25 ccw(c-1222.56,-89.79) -1258.11,-96.15 cw(c-1222.56,-89.79) RJ3.1@-1248.1,-64.25 ; v1@-1270.79,-102.77 cw(c-1286.18,-118.16) -1264.42,-118.16 ccw(c-1286.18,-118.16) v1@-1270.79,-102.77 ; v1@-1269.92,-91.42 ccw(c-1277.86,-80.58) -1264.42,-80.58 cw(c-1277.86,-80.58) v1@-1269.92,-91.42 ; v1@-1267.95,-97.91 cw(c-1245.53,-93.9) -1261.64,-77.79 ccw(c-1245.53,-93.9) v1@-1267.95,-97.91 ; -1264.42,-113 cw(c-1249.97,-113) -1260.19,-102.77 ccw(c-1249.97,-113) -1264.42,-113 ; -1264.42,-81.95 ccw(c-1249.97,-81.95) -1260.19,-92.17 cw(c-1249.97,-81.95) -1264.42,-81.95
  Bottom Layer w8: v1(-1265.49,-97.47) -1232.56,-130.4 -1002.8,-130.4 -995.23,-137.97 -903.26,-137.97 -852.09,-189.14 v1(-852.09,-245.39) ; -593.15,-290.98 -473.38,-171.21 -372.56,-171.21 -248.95,-47.61 v1(-248.95,-37.42) ; -270.66,-69.32 ccw(c-302.56,-37.42) -257.45,-37.42 cw(c-302.56,-37.42) -270.66,-69.32 ; -257.01,-55.66 ccw(c-275.25,-37.42) -249.45,-37.42 cw(c-275.25,-37.42) -257.01,-55.66
  Bottom Layer w10: v1(-852.94,-331.64) -633.8,-331.64 -593.15,-290.98
I2C1_SDA: MP1.24 RJ2.1 U1.34 YJ1.11 | length 2107.3
  Top Layer w8: v1@-851.4,-293.54 -842.58,-284.73 ; YJ1.11@-778.62,-284.73 -842.58,-284.73 ; U1.34@-295.24,-87.12 -295.24,-34.57 ; v1(-283.72,-23.05) -295.24,-34.57 ; -842.59,-284.73 cw(c-847.3,-280.01) -849.27,-286.38 ccw(c-847.3,-280.01) -842.59,-284.73 ; -842.59,-284.73 ccw(c-838.31,-289.01) -843.91,-291.29 cw(c-838.31,-289.01) -842.59,-284.73 ; -819.47,-284.73 cw(c-819.47,-294.08) -812.86,-287.47 ccw(c-819.47,-294.08) -819.47,-284.73 ; -819.47,-284.73 ccw(c-819.47,-275.37) -812.86,-281.99 cw(c-819.47,-275.37) -819.47,-284.73 ; -295.24,-34.57 cw(c-287.2,-42.61) -285.21,-31.41 ccw(c-287.2,-42.61) -295.24,-34.57 ; -295.24,-34.57 ccw(c-303.28,-26.53) -292.09,-24.54 cw(c-303.28,-26.53) -295.24,-34.57 ; v1@-851.42,-294.86 cw(c-826.96,-319.33) -826.96,-284.73 ccw(c-826.96,-319.33) v1@-851.42,-294.86 ; v1@-845.77,-300.52 cw(c-807.64,-338.64) -807.64,-284.73 ccw(c-807.64,-338.64) v1@-845.77,-300.52 ; U1.34@-295.24,-71.39 cw(c-235.37,-71.39) -277.71,-29.06 ccw(c-235.37,-71.39) U1.34@-295.24,-71.39 ; -295.24,-52.07 cw(c-254.69,-52.07) -283.36,-23.4 ccw(c-254.69,-52.07) -295.24,-52.07 ; -295.24,-32.76 cw(c-274,-32.76) -289.02,-17.74 ccw(c-274,-32.76) -295.24,-32.76
  Top Layer w10: RJ2.1@-1301.76,-63.68 -1301.76,-124.88 MP1.24@-1284.11,-142.54 ; -1301.76,-81.79 cw(c-1283.66,-81.79) -1296.46,-68.99 ccw(c-1283.66,-81.79) -1301.76,-81.79 ; -1301.76,-81.79 ccw(c-1319.87,-81.79) -1307.07,-68.99 cw(c-1319.87,-81.79) -1301.76,-81.79 ; v1@-1307.51,-102.4 cw(c-1321.39,-116.27) -1301.76,-116.27 ccw(c-1321.39,-116.27) v1@-1307.51,-102.4 ; v1@-1307.51,-91.79 ccw(c-1321.39,-77.91) -1301.76,-77.91 cw(c-1321.39,-77.91) v1@-1307.51,-91.79 ; -1301.76,-114.13 cw(c-1285.17,-114.13) -1296.9,-102.4 ccw(c-1285.17,-114.13) -1301.76,-114.13 ; -1301.76,-80.06 ccw(c-1285.17,-80.06) -1296.9,-91.79 cw(c-1285.17,-80.06) -1301.76,-80.06
  Bottom Layer w8: v1(-1302.21,-97.09) -1302.21,-138.35 -1226.88,-213.67 -1140.96,-213.67 -1091.75,-262.88 -1015.67,-262.88 -990.31,-237.52 -908.76,-237.52 v1(-851.78,-294.51) -636.08,-294.51 -495.47,-153.9 -388.23,-153.9 -283.72,-49.39 v1(-283.72,-23.05)
NetCY1_1: CY1.1 YJ1.1 | length 365.3
  Top Layer w10: YJ1.1@-778.62,-40.63 -767.53,-29.53 CY1.1@-673.91,-29.53 ; -692.02,-29.53 cw(c-692.02,-47.64) -679.22,-34.84 ccw(c-692.02,-47.64) -692.02,-29.53 ; -692.02,-29.54 ccw(c-692.02,-11.43) -679.22,-24.23 cw(c-692.02,-11.43) -692.02,-29.54 ; YJ1.1@-763.1,-34.45 cw(c-755.93,-37.22) -755.93,-29.54 ccw(c-755.93,-37.22) YJ1.1@-763.1,-34.45 ; YJ1.1@-753.77,-38.06 cw(c-741.33,-42.88) -741.33,-29.53 ccw(c-741.33,-42.88) YJ1.1@-753.77,-38.06 ; YJ1.1@-752.17,-35.59 cw(c-737.54,-50.22) -737.54,-29.53 ccw(c-737.54,-50.22) YJ1.1@-752.17,-35.59 ; YJ1.1@-745.1,-42.67 cw(c-713.4,-74.36) -713.4,-29.53 ccw(c-713.4,-74.36) YJ1.1@-745.1,-42.67 ; YJ1.1@-744.45,-41.67 cw(c-726.73,-48.54) -726.73,-29.54 ccw(c-726.73,-48.54) YJ1.1@-744.45,-41.67
NetCY1_2: CY1.2 YJ1.2 | length 213.9
  Top Layer w8: -733.08,-65.04 -722.4,-54.36 -642.22,-54.36 -633.91,-46.05 ; CY1.2@-633.91,-29.53 -633.91,-46.05 ; -633.91,-46.05 cw(c-622.12,-46.05) -628.97,-36.45 ccw(c-622.12,-46.05) -633.91,-46.05 ; -633.91,-46.05 ccw(c-645.7,-46.05) -638.85,-36.45 cw(c-645.7,-46.05) -633.91,-46.05
  Top Layer w10: YJ1.2@-778.62,-65.04 -733.08,-65.04
NetCY4_1: CY4.1 YJ1.3 | length 164.9
  Top Layer w10: YJ1.3@-778.62,-89.45 -727.21,-89.45 -717.06,-79.3 CY4.1@-674.83,-79.3 ; -692.94,-79.3 cw(c-692.94,-97.41) -680.14,-84.61 ccw(c-692.94,-97.41) -692.94,-79.3 ; -692.94,-79.3 ccw(c-692.94,-61.2) -680.14,-74 cw(c-692.94,-61.2) -692.94,-79.3
NetCY4_2: CY4.2 YJ1.4 | length 264.3
  Top Layer w8: YJ1.4@-778.62,-113.86 -728.91,-113.86 -721.71,-106.66 -641.19,-106.66 -634.83,-100.31 CY4.2@-634.83,-79.3 ; -737.78,-113.86 cw(c-737.78,-104.51) -744.39,-111.12 ccw(c-737.78,-104.51) -737.78,-113.86 ; -737.78,-113.86 ccw(c-737.78,-123.21) -744.39,-116.6 cw(c-737.78,-123.21) -737.78,-113.86 ; -634.83,-99.82 cw(c-614.31,-99.82) -628.82,-85.31 ccw(c-614.31,-99.82) -634.83,-99.82 ; -634.83,-99.82 ccw(c-655.35,-99.82) -640.84,-85.31 cw(c-655.35,-99.82) -634.83,-99.82
NetCY7_1: CY7.1 YJ1.13 | length 198.9
  Top Layer w8: YJ1.13@-778.62,-333.55 -716.53,-333.55 -707.4,-324.41 CY7.1@-677.33,-324.41 ; -737.78,-333.55 cw(c-737.78,-324.19) -744.39,-330.81 ccw(c-737.78,-324.19) -737.78,-333.55 ; -737.78,-333.55 ccw(c-737.78,-342.9) -744.39,-336.28 cw(c-737.78,-342.9) -737.78,-333.55 ; -697.85,-324.41 cw(c-697.85,-344.93) -683.34,-330.42 ccw(c-697.85,-344.93) -697.85,-324.41 ; -697.85,-324.41 ccw(c-697.85,-303.89) -683.34,-318.4 cw(c-697.85,-303.89) -697.85,-324.41
NetCY8_1: CY8.1 CY10.1 YJ1.14 | length 480.8
  Top Layer w8: YJ1.14@-778.62,-357.95 -727.94,-357.95 ; CY10.1@-677.45,-369.92 v1(-715.97,-369.92) -727.94,-357.95 ; -737.78,-357.96 cw(c-737.78,-348.6) -744.39,-355.22 ccw(c-737.78,-348.6) -737.78,-357.96 ; -737.78,-357.95 ccw(c-737.78,-367.31) -744.39,-360.69 cw(c-737.78,-367.31) -737.78,-357.95 ; -727.94,-357.96 cw(c-736.84,-366.86) -724.38,-368.69 ccw(c-736.84,-366.86) -727.94,-357.96 ; -727.94,-357.96 ccw(c-719.03,-349.05) -717.2,-361.51 cw(c-719.03,-349.05) -727.94,-357.96 ; -697.97,-369.92 cw(c-697.97,-390.44) -683.46,-375.93 ccw(c-697.97,-390.44) -697.97,-369.92 ; -697.97,-369.92 ccw(c-697.97,-349.4) -683.46,-363.91 cw(c-697.97,-349.4) -697.97,-369.92 ; -695.45,-369.92 cw(c-695.45,-349.4) -709.96,-363.91 ccw(c-695.45,-349.4) -695.45,-369.92 ; -695.45,-369.92 ccw(c-695.45,-390.44) -709.96,-375.93 cw(c-695.45,-390.44) -695.45,-369.92
  Bottom Layer w8: CY8.1@-755.92,-371.2 -717.26,-371.2 v1(-715.97,-369.92) ; CY8.1@-745.76,-376.54 cw(c-732.88,-389.42) -732.88,-371.2 ccw(c-732.88,-389.42) CY8.1@-745.76,-376.54 ; CY8.1@-745.76,-364.52 ccw(c-729.63,-348.38) -729.63,-371.2 cw(c-729.63,-348.38) CY8.1@-745.76,-364.52 ; CY8.1@-739.59,-371.2 ccw(c-739.59,-346.3) -721.98,-363.91 cw(c-739.59,-346.3) CY8.1@-739.59,-371.2 ; -733.39,-371.2 cw(c-733.39,-387.34) -721.98,-375.93 ccw(c-733.39,-387.34) -733.39,-371.2